# EAGLE board galePCB (EAGLE 7.5.0)
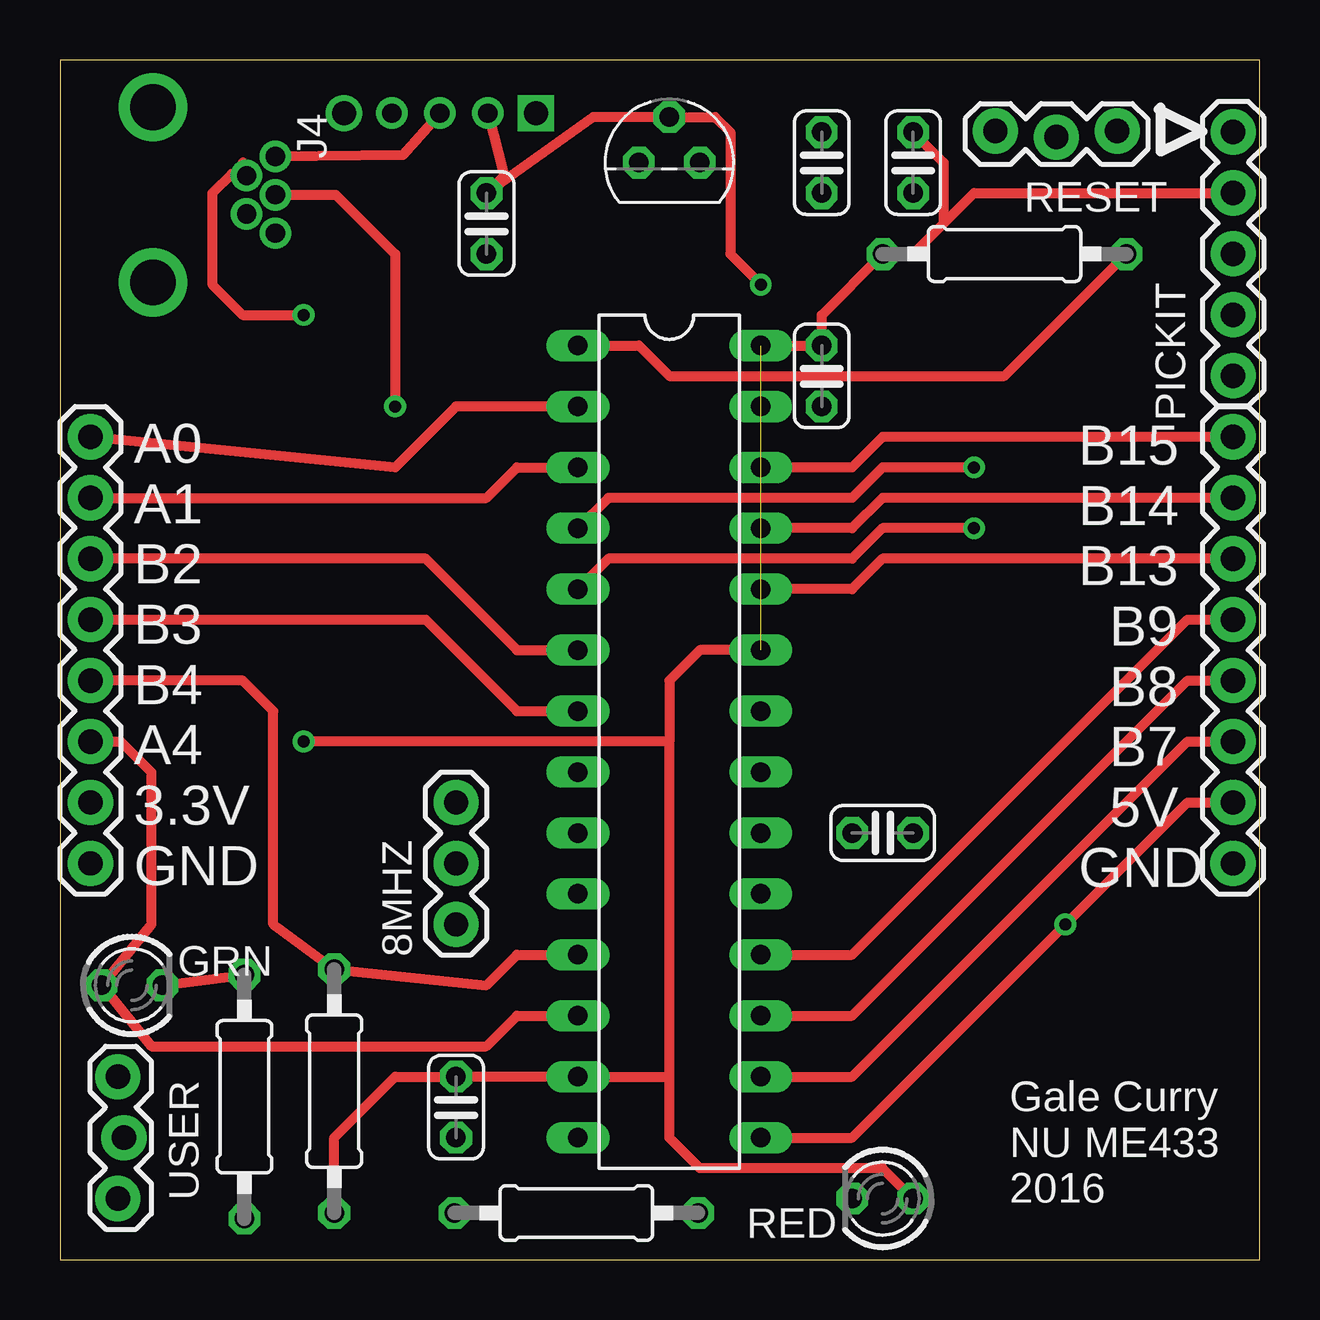
[diagram p0: board, top side]
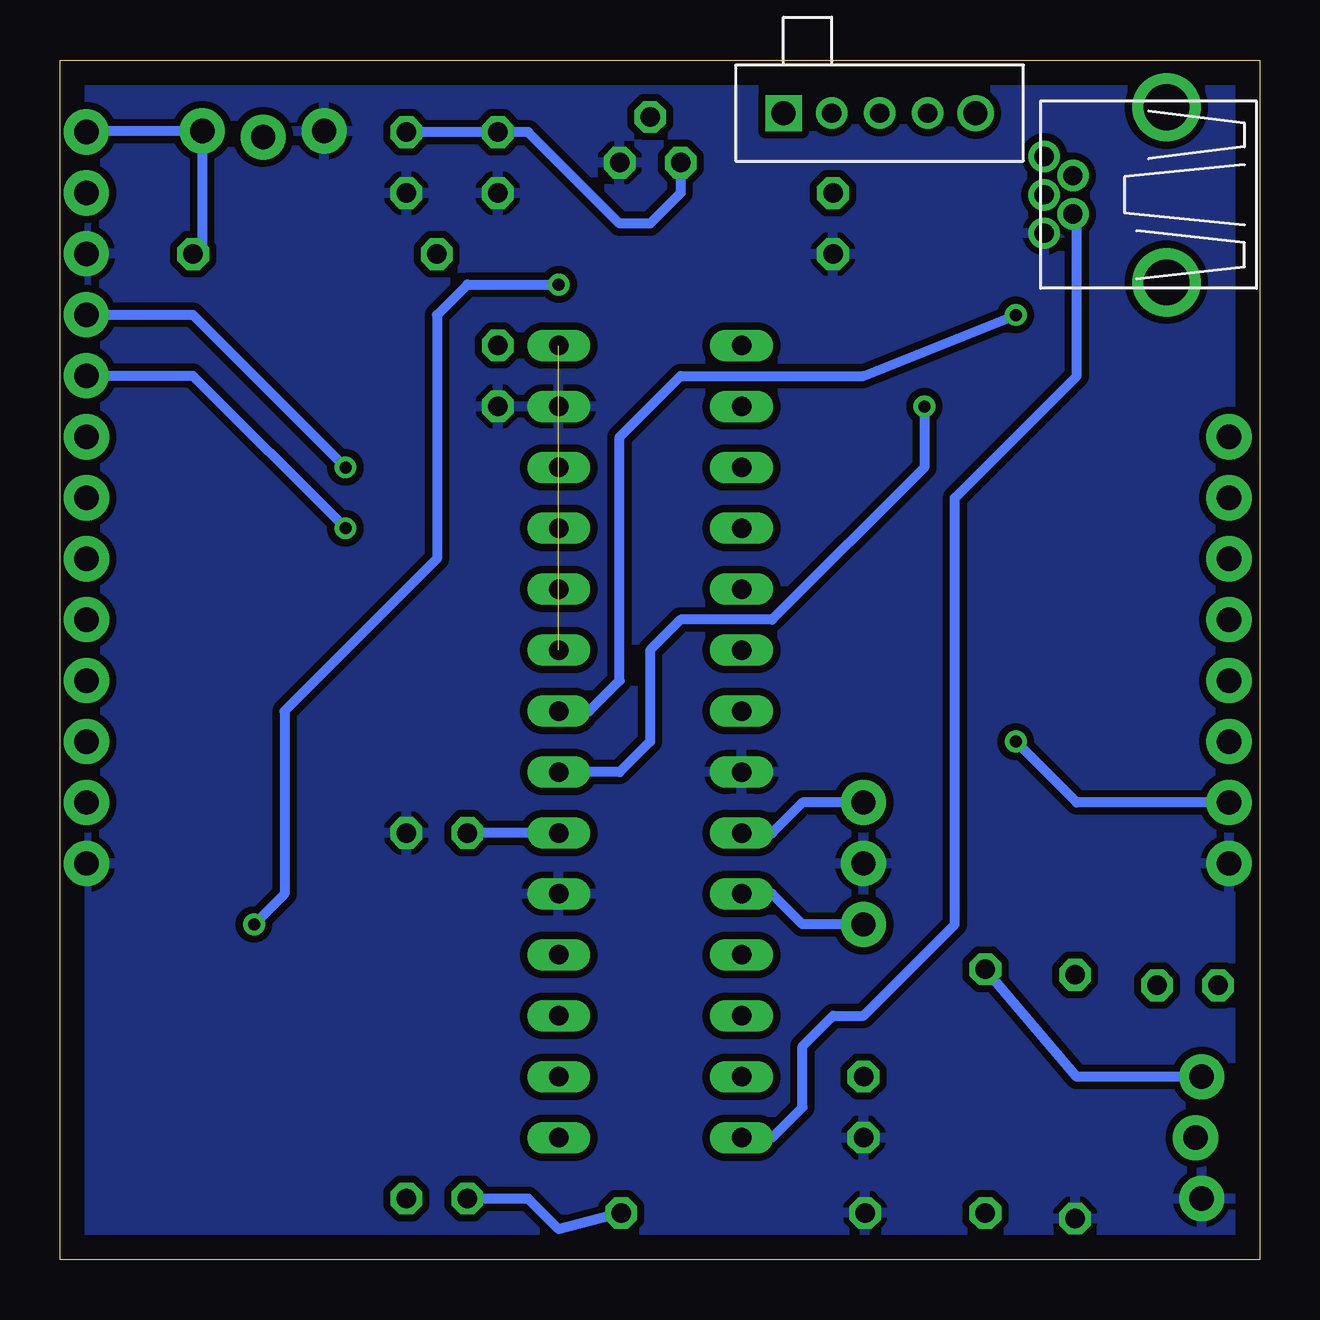
[diagram p1: board, bottom side, seen from below]

Size 50 x 50 mm. Coordinates in mm from the lower left corner, seen from the top.
Outline: 0,0 50,0 50,50 0,50 0,0
Copper layers (1*16): Top 0.035mm / dielectric 1.5mm / Bottom 0.035mm
Design rules "default": minimum track width 10mil, minimum drill 24mil, track to track 8mil, track to pad 8mil, pad to pad 8mil, via to via 8mil, smd to smd 8mil, copper to edge 40mil, drill to drill 8mil, minimum pad ring 10mil, minimum via ring 8mil, stop-mask expansion 4mil, vias tented up to drill 0mil, thermal gap 10mil

## Footprints (pad centres in the part's own frame; a part is rotated, then mirrored left to right if it is on the bottom)
1X03 = drill 1.016 pad 1.88: 1 0,0; 2 2.54,0; 3 5.08,0
C025-024X044 = drill 0.813 octagon: 1 -1.27,0; 2 1.27,0
LED3MM = drill 0.813 octagon: A -1.27,0; K 1.27,0
1X08_ROUND = drill 1.016 pad 1.88: 1 0,0; 2 2.54,0; 3 5.08,0; 4 7.62,0; 5 10.16,0; 6 12.7,0; 7 15.24,0; 8 17.78,0
USB-MB-H = drill 0.8: D+ 5.1,0; D- 3.9,0.8; GND 5.1,-1.6; ID 3.9,-0.8; VBUS 5.1,1.6 | drill 1.9: P$6 0,-3.65; P$7 0,3.65
1X05 = drill 1.016 pad 1.88: 1 0,0; 2 2.54,0; 3 5.08,0; 4 7.62,0; 5 10.16,0
0207/10 = drill 0.813 octagon: 1 -5.08,0; 2 5.08,0
1X03_LOCK = drill 1.016 pad 1.88: 1 0,0.127; 2 2.54,-0.127; 3 5.08,0.127
DIL28-3 = drill 0.813 long: 1 -16.51,-3.81; 2 -13.97,-3.81; 3 -11.43,-3.81; 4 -8.89,-3.81; 5 -6.35,-3.81; 6 -3.81,-3.81; 7 -1.27,-3.81; 8 1.27,-3.81; 9 3.81,-3.81; 10 6.35,-3.81; 11 8.89,-3.81; 12 11.43,-3.81; 13 13.97,-3.81; 14 16.51,-3.81; 15 16.51,3.81; 16 13.97,3.81; 17 11.43,3.81; 18 8.89,3.81; 19 6.35,3.81; 20 3.81,3.81; 21 1.27,3.81; 22 -1.27,3.81; 23 -3.81,3.81; 24 -6.35,3.81; 25 -8.89,3.81; 26 -11.43,3.81; 27 -13.97,3.81; 28 -16.51,3.81
TO92 = drill 0.813 octagon: 1 1.27,0; 2 0,1.905; 3 -1.27,0
SLIDESWITCH = drill 1 square: 1 -4,0 | drill 0.8: 2 -2,0; 3 0,0; 4 2,0 | drill 1: 5 4,0

## Placement (x,y rotation side)
8MHZ  [1X03]  16.51,13.97 90 top
C1  +10uF-  [C025-024X044]  34.29,17.78 0 top
C3  0.1 uF  [C025-024X044]  31.75,36.83 270 top
C4  0.1uF  [C025-024X044]  17.78,43.18 270 top
C5  0.1uF  [C025-024X044]  35.56,45.72 270 top
C6  10uF  [C025-024X044]  31.75,45.72 270 top
C7  0.1uF  [C025-024X044]  16.51,6.35 270 top
GRN  [LED3MM]  3,11.43 0 top
J1  [1X08_ROUND]  1.27,16.51 90 top
J2  [1X08_ROUND]  48.9,16.51 90 top
J4  USB-MB-H  [USB-MB-H]  3.88,44.38 0 top
PICKIT  [1X05]  48.9,47 270 top
R5  10k  [0207/10]  39.37,41.91 180 top
R6  10k  [0207/10]  11.43,7.02 270 top
R7  330  [0207/10]  7.69,6.78 90 top
R8  330  [0207/10]  21.52,1.94 0 top
RED  [LED3MM]  34.29,2.54 180 top
RESET  [1X03_LOCK]  38.99,46.91 0 top
U$1  PIC32MX250F128B  [DIL28-3]  25.4,21.59 270 top
U$2  MCP1702  [TO92]  25.4,45.72 0 top
U$4  SLIDESWITCH  [SLIDESWITCH]  15.83,47.79 0 bottom
USER  [1X03_LOCK]  2.54,2.54 90 top

## Library data of the parts
8MHZ C1 C3-C7 GRN J4 PICKIT R5-R8 RED RESET U$1 U$2 U$4 USER = myPCB
J1 J2 = myPCB; PROD_ID: CONN-08437

## Nets
+3V3: C3.1 C5.1 C6.1 C7.1 J1.2 PICKIT.2 R5.2 R6.2 RED.A U$1.13 U$1.23 U$1.28 U$2.3
+5V: C4.1 J2.2 U$1.15 U$2.2 U$4.2
A0: J1.8 U$1.2
A1: J1.7 U$1.3
A4/LED: GRN.A J1.3 U$1.12
B2: J1.6 U$1.6
B3: J1.5 U$1.7
B4/USER: J1.4 R6.1 U$1.11 USER.3
B7: J2.3 U$1.16
B8: J2.4 U$1.17
B9: J2.5 U$1.18
B13: J2.6 U$1.24
B14: J2.7 U$1.25
B15: J2.8 U$1.26
D+: J4.D+ U$1.21
D-: J4.D- U$1.22
GND: 8MHZ.2 C1.2 C3.2 C4.2 C5.2 C6.2 C7.2 J1.1 J2.1 J4.GND PICKIT.3 R7.1 R8.1 RESET.1 U$1.8 U$1.19 U$1.27 U$2.1 USER.1
MCLR: PICKIT.1 R5.1 RESET.3 U$1.1
N$1: C1.1 U$1.20
N$2: 8MHZ.3 U$1.9
N$3: 8MHZ.1 U$1.10
N$5: R8.2 RED.K
N$6: GRN.K R7.2
PGC: PICKIT.5 U$1.5
PGD: PICKIT.4 U$1.4
USBID: J4.ID U$1.14
VBUS: J4.VBUS U$4.3

## Tracks (layer width: path | path; a pad name or v marks a point on that pad's centre or on a via)
+3V3  (via drill 0.5)  (1 unrouted)
  Top 0.406: R6.2 11.43,5.08 13.97,7.62 C7.1 U$1.13 25.4,7.62 | U$1.28 C3.1 31.75,39.37 R5.2 35.56,41.91 36.83,43.18 | RED.A 34.29,3.81 26.67,3.81 25.4,5.08 25.4,7.62 | 25.4,7.62 25.4,21.59 | C5.1 36.83,45.72 36.83,43.18 | 36.83,43.18 38.1,44.45 PICKIT.2 | U$1.23 26.67,25.4 25.4,24.13 25.4,21.59 | 25.4,21.59 v10.16,21.59
  Bottom 0.406: U$2.3 24.13,44.45 25.4,43.18 26.67,43.18 30.48,46.99 C6.1 C5.1 | J1.2 7.62,19.05 v10.16,21.59
+5V  (via drill 0.5)
  Top 0.406: U$1.15 33.02,5.08 v41.91,13.97 46.99,19.05 J2.2 | U$4.2 18.51,45.18 C4.1 22.23,47.62 U$2.2 27.3,47.62 27.94,46.99 27.94,41.91 v29.21,40.64
  Bottom 0.406: v41.91,13.97 40.64,15.24 40.64,22.86 34.29,29.21 34.29,39.37 33.02,40.64 v29.21,40.64
A0
  Top 0.406: U$1.2 16.51,35.56 13.97,33.02 J1.8
A1
  Top 0.406: J1.7 17.78,31.75 19.05,33.02 U$1.3
A4/LED
  Top 0.406: J1.3 2.54,21.59 3.81,20.32 3.81,13.97 GRN.A 3.81,8.89 17.78,8.89 19.05,10.16 U$1.12
B2
  Top 0.406: U$1.6 19.05,25.4 15.24,29.21 J1.6
B3
  Top 0.406: J1.5 15.24,26.67 19.05,22.86 U$1.7
B4/USER
  Top 0.406: J1.4 7.62,24.13 8.89,22.86 8.89,13.97 R6.1 17.78,11.43 19.05,12.7 U$1.11
  Bottom 0.406: USER.3 7.62,7.62 R6.1
B7
  Top 0.406: U$1.16 33.02,7.62 46.99,21.59 J2.3
B8
  Top 0.406: U$1.17 33.02,10.16 46.99,24.13 J2.4
B9
  Top 0.406: U$1.18 33.02,12.7 46.99,26.67 J2.5
B13
  Top 0.406: J2.6 34.29,29.21 33.02,27.94 U$1.24
B14
  Top 0.406: J2.7 34.29,31.75 33.02,30.48 U$1.25
B15
  Top 0.406: J2.8 34.29,34.29 33.02,33.02 U$1.26
D+  (via drill 0.5)
  Top 0.406: J4.D+ 11.5,44.38 13.97,41.91 v13.97,35.56
  Bottom 0.406: v13.97,35.56 13.97,33.02 20.32,26.67 24.13,26.67 25.4,25.4 25.4,21.59 26.67,20.32 U$1.21
D-  (via drill 0.5)
  Top 0.406: 7.62,45.72 7.71,45.63 J4.D- 7.15,45.25 6.35,44.45 6.35,40.64 7.62,39.37 v10.16,39.37
  Bottom 0.406: U$1.22 27.94,22.86 26.67,24.13 26.67,34.29 24.13,36.83 16.51,36.83 v10.16,39.37
GND
  pour Bottom (isolate 0.305): 0,49.53 0,0 49.53,0 49.53,49.53
MCLR
  Top 0.406: U$1.1 24.13,38.1 25.4,36.83 39.37,36.83 R5.1
  Bottom 0.406: PICKIT.1 48.86,47.04 RESET.3 44.07,42.29 R5.1
N$1
  Bottom 0.406: U$1.20 C1.1
N$2
  Bottom 0.406: 8MHZ.3 19.05,19.05 20.32,17.78 U$1.9
N$3
  Bottom 0.406: 8MHZ.1 19.05,13.97 20.32,15.24 U$1.10
N$5
  Bottom 0.406: R8.2 29.21,1.27 30.48,2.54 RED.K
N$6
  Top 0.406: GRN.K R7.2
PGC  (via drill 0.5)
  Top 0.406: v38.1,30.48 34.29,30.48 33.02,29.21 22.86,29.21 U$1.5
  Bottom 0.406: PICKIT.5 44.46,36.84 v38.1,30.48
PGD  (via drill 0.5)
  Top 0.406: v38.1,33.02 34.29,33.02 33.02,31.75 22.86,31.75 U$1.4
  Bottom 0.406: PICKIT.4 44.46,39.38 v38.1,33.02
USBID
  Bottom 0.406: U$1.14 20.32,5.08 19.05,6.35 19.05,8.89 17.78,10.16 16.51,10.16 12.7,13.97 12.7,31.75 7.62,36.83 7.62,43.56 J4.ID
VBUS
  Top 0.406: J4.VBUS 14.3,46.05 U$4.3

## Text on the board
tPlace: A0 / A1 / B2 / B3 / B4 / A4 / 3.3V / GND | B15 / B14 / B13 / B9 / B8 / B7 / 5V / GND | Gale Curry / NU ME433 / 2016